# EAGLE board arduino shield_03 (EAGLE 9.5.2)
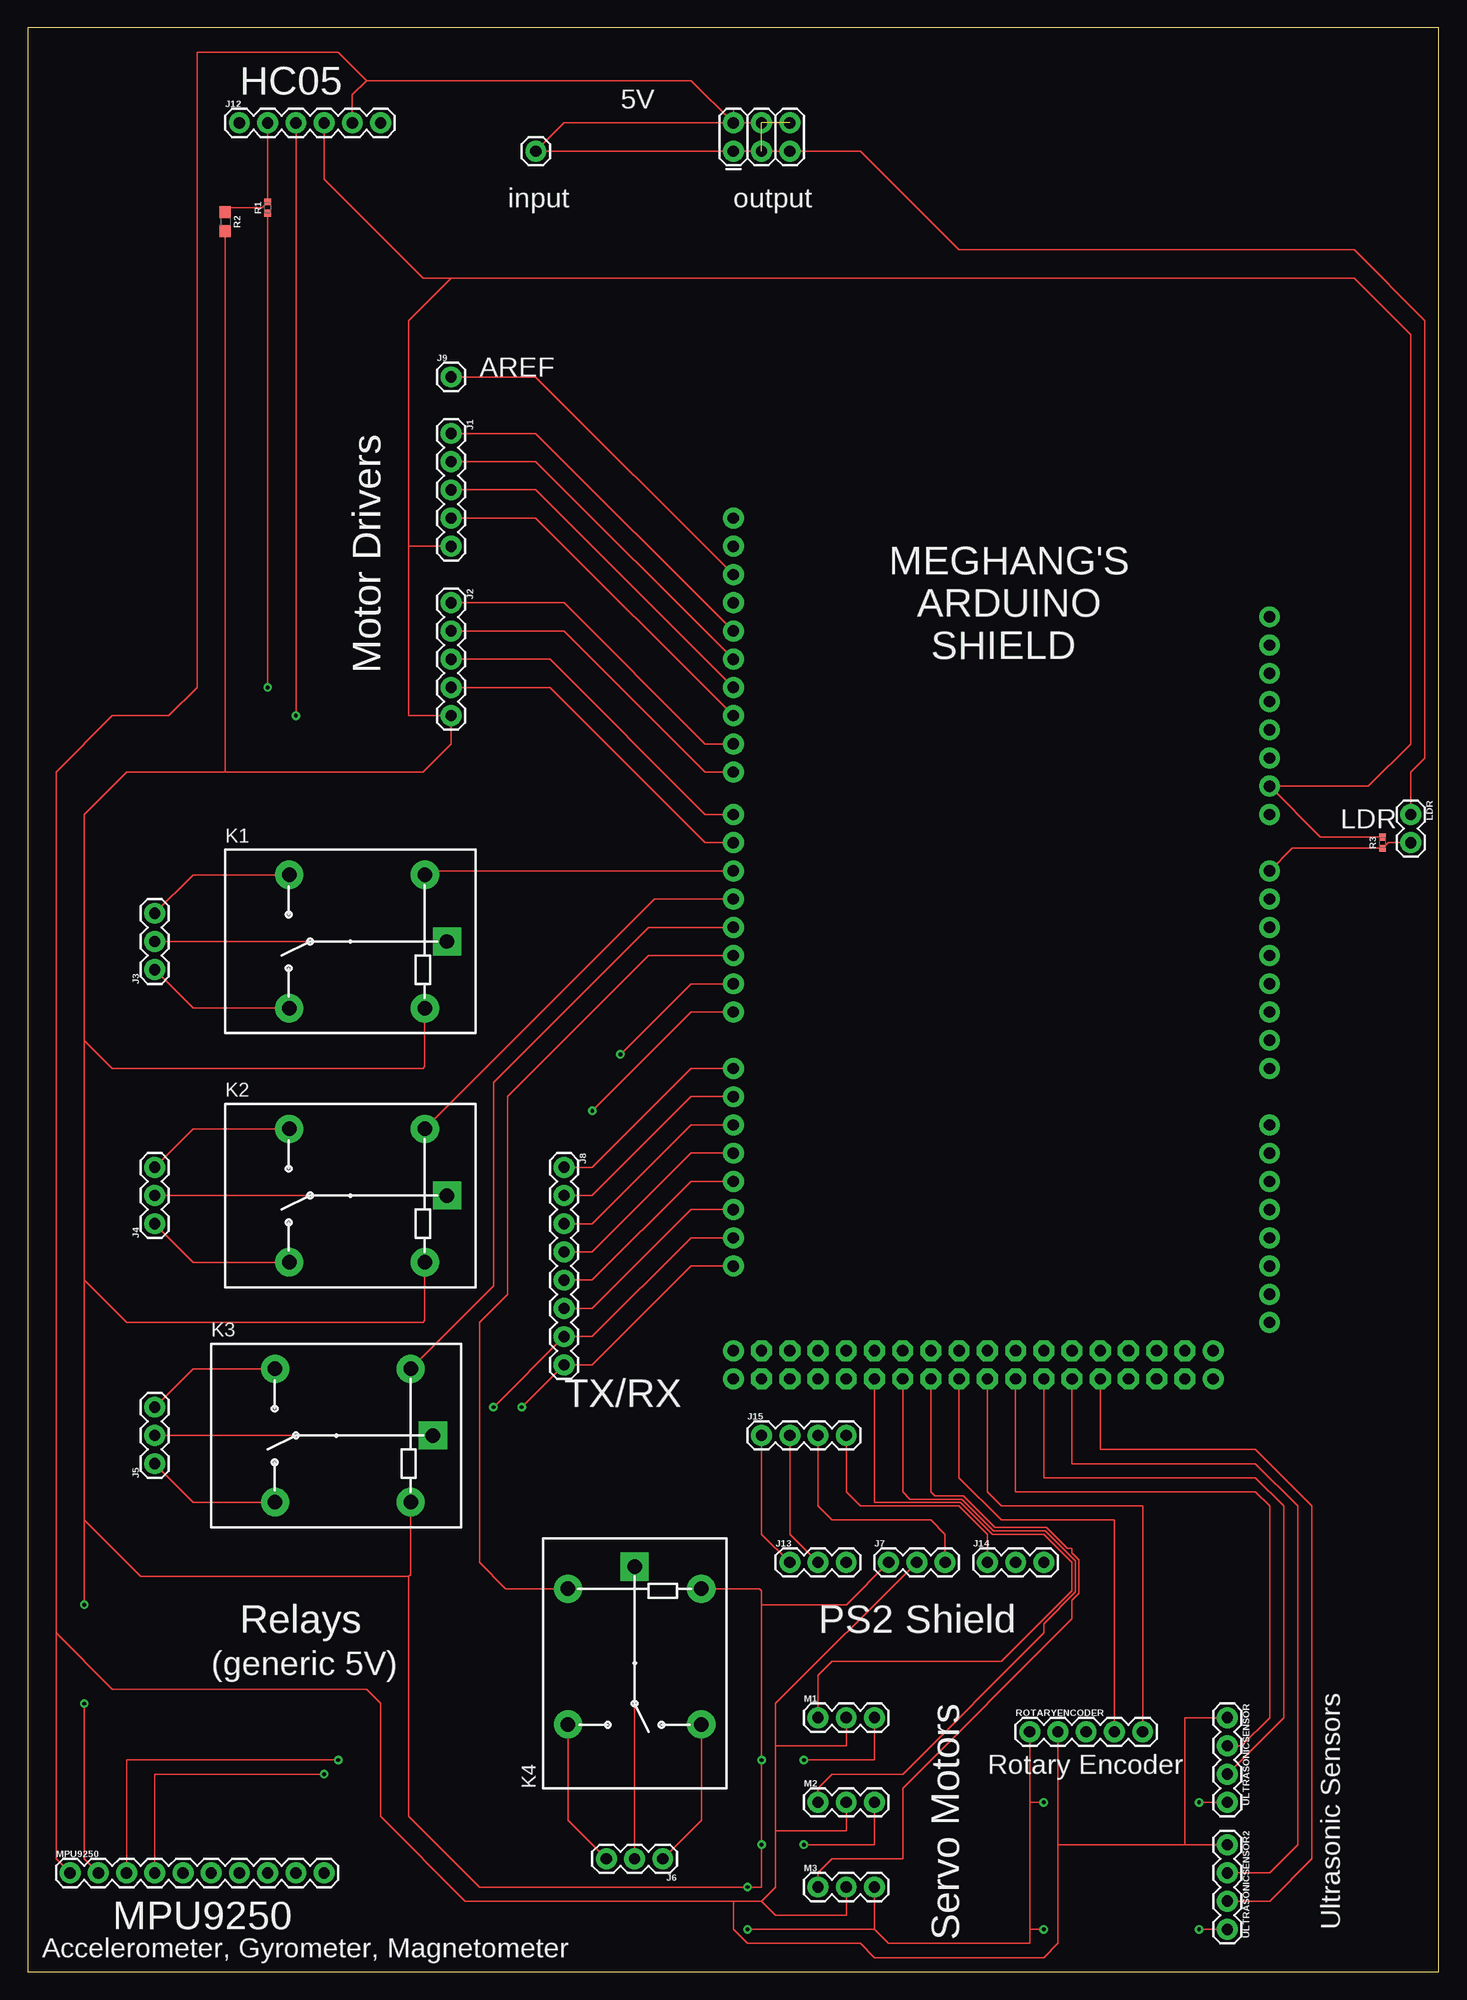
[diagram p0: board, top side]
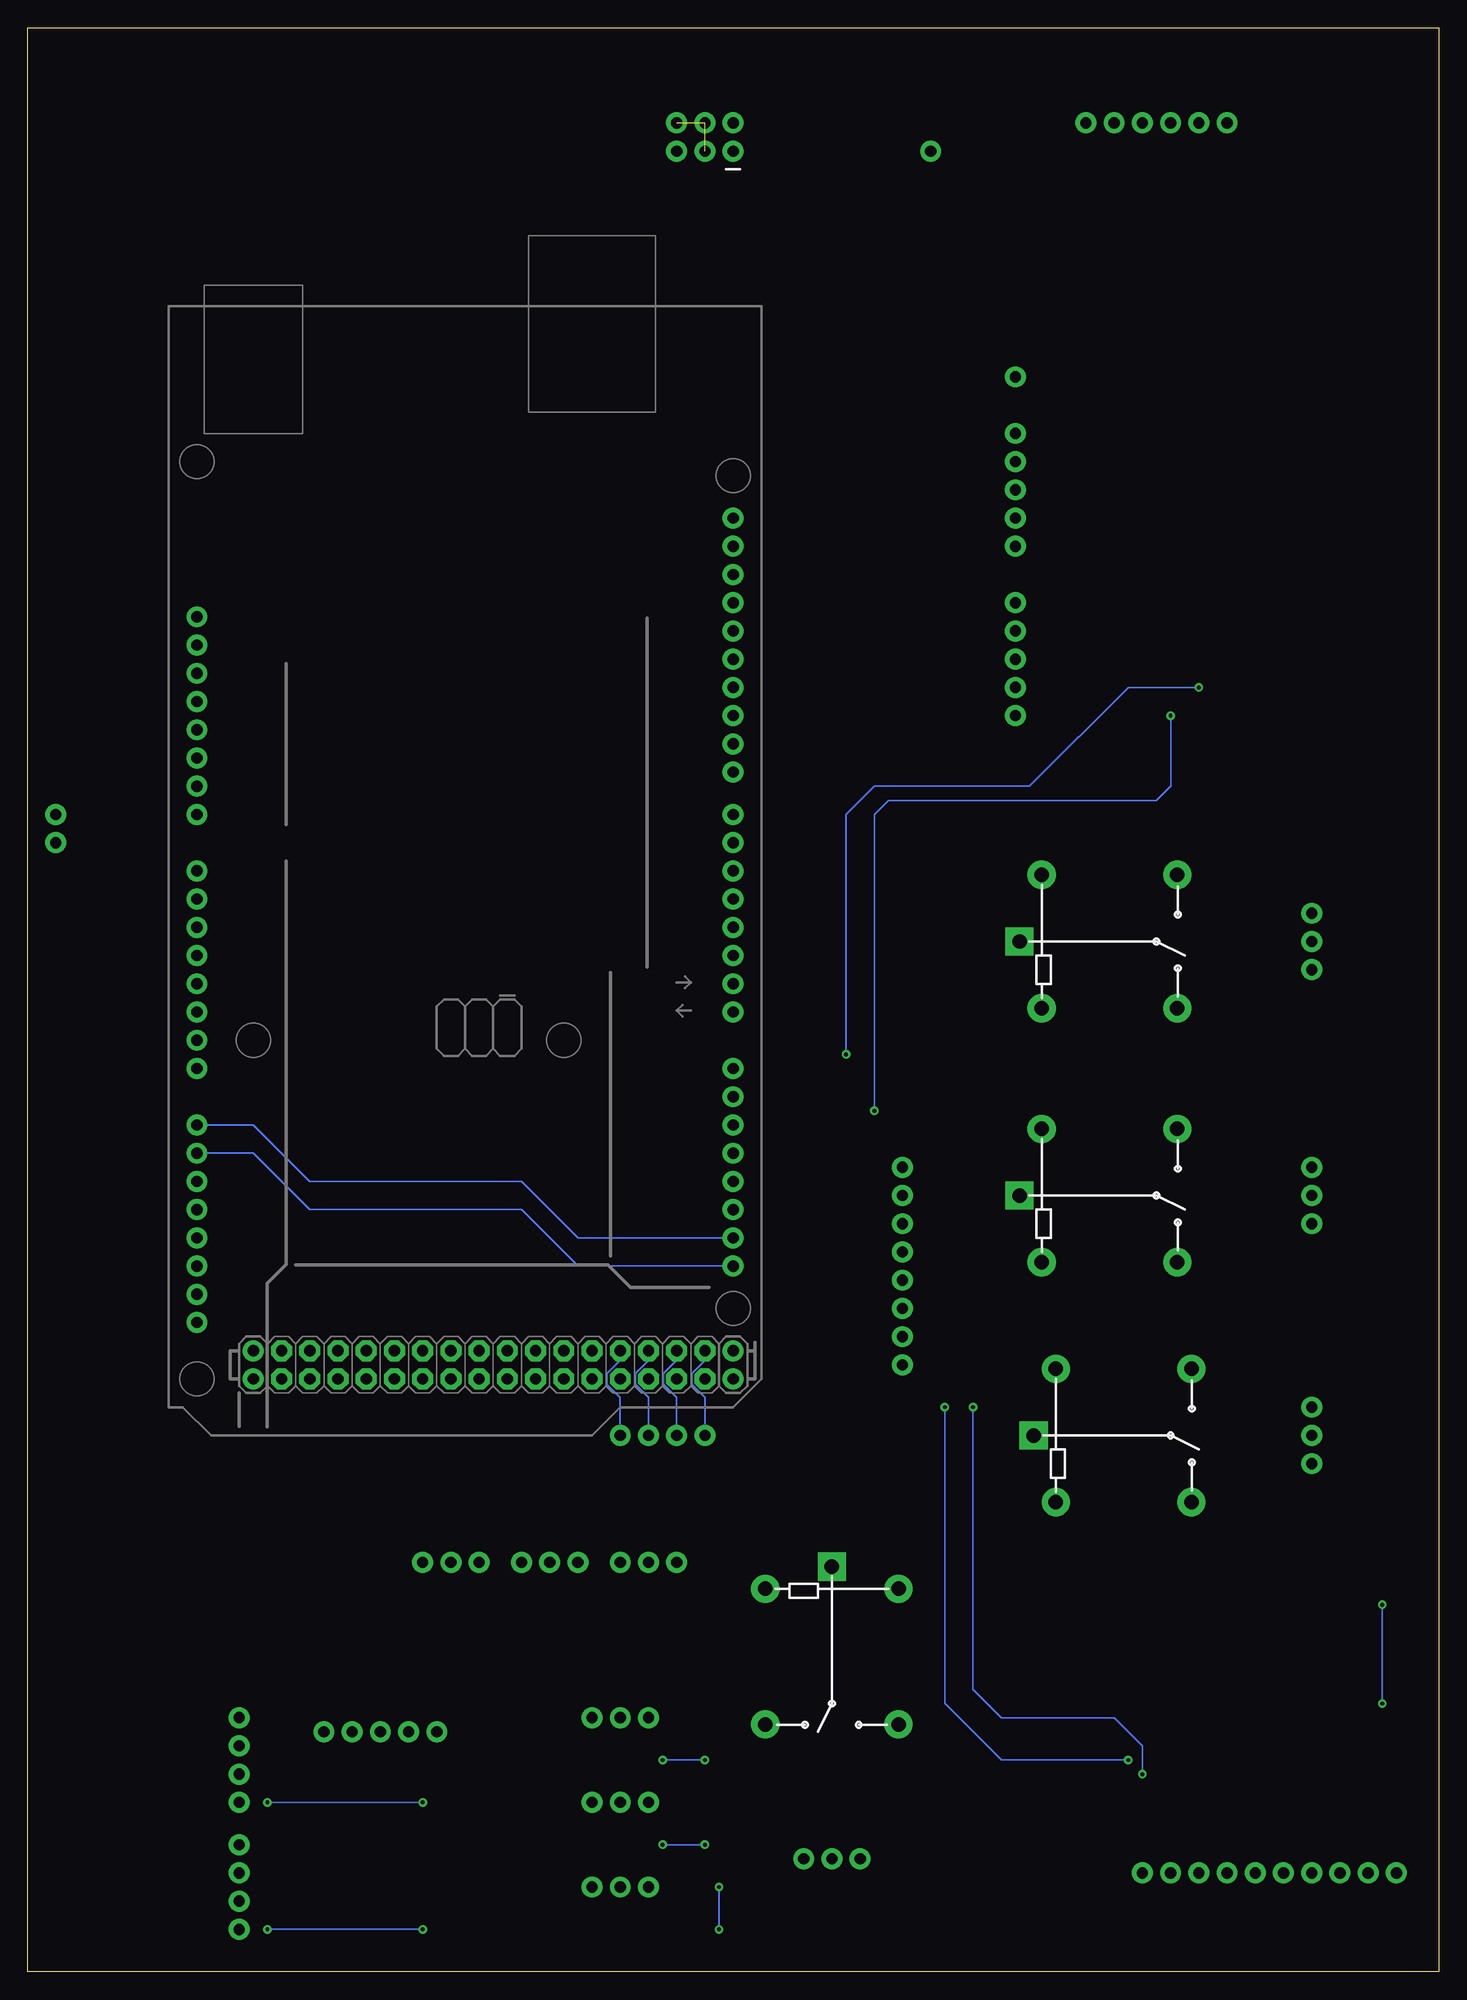
[diagram p1: board, bottom side, seen from below]

Size 126.98 x 174.93 mm. Coordinates in mm from the lower left corner, seen from the top.
Outline: 0,0 126.98,0 126.98,174.93 0,174.93 0,0
Copper layers (1*16): Top 0.035mm / dielectric 1.5mm / Bottom 0.035mm
Design rules "default": minimum track width 6mil, minimum drill 0.35mm, track to track 6mil, track to pad 6mil, pad to pad 6mil, via to via 6mil, smd to smd 6mil, copper to edge 40mil, drill to drill 6mil, minimum pad ring 10mil, minimum via ring 8mil, stop-mask expansion 4mil, vias tented up to drill 0mil, thermal gap 10mil

## Footprints (pad centres in the part's own frame; a part is rotated, then mirrored left to right if it is on the bottom)
ARDUINO_MEGA_NO_SILK = drill 1.016 pad 1.88: 0 13.97,24.13; 1 11.43,24.13; 2 8.89,24.13; 3 6.35,24.13; 3.3V -13.97,-24.13; 4 3.81,24.13; 5 1.27,24.13; 5V -11.43,-24.13; 5V@1 44.45,24.13; 5V@2 46.99,24.13; 6 -1.27,24.13; 7 -3.81,24.13; 8 -7.62,24.13; 9 -10.16,24.13; 10 -12.7,24.13; 11 -15.24,24.13; 12 -17.78,24.13; 13 -20.32,24.13; 14 19.05,24.13; 15 21.59,24.13; 16 24.13,24.13; 17 26.67,24.13; 18 29.21,24.13; 19 31.75,24.13; 20 34.29,24.13; 21 36.83,24.13; A0 1.27,-24.13; A1 3.81,-24.13; A2 6.35,-24.13; A3 8.89,-24.13; A4 11.43,-24.13; A5 13.97,-24.13; A6 16.51,-24.13; A7 19.05,-24.13; A8 24.13,-24.13; A9 26.67,-24.13; A10 29.21,-24.13; A11 31.75,-24.13; A12 34.29,-24.13; A13 36.83,-24.13; A14 39.37,-24.13; A15 41.91,-24.13; AREF -25.4,24.13; GND -8.89,-24.13; GND@1 -6.35,-24.13; GND@2 44.45,-19.05; GND@3 46.99,-19.05; GND@4 -22.86,24.13; IOREF -19.05,-24.13; NC -21.59,-24.13; RESET -16.51,-24.13; SCL -30.48,24.13; SDA -27.94,24.13; VIN -3.81,-24.13 | drill 1.016 pad 1.88 octagon: 22 44.45,21.59; 23 46.99,21.59; 24 44.45,19.05; 25 46.99,19.05; 26 44.45,16.51; 27 46.99,16.51; 28 44.45,13.97; 29 46.99,13.97; 30 44.45,11.43; 31 46.99,11.43; 32 44.45,8.89; 33 46.99,8.89; 34 44.45,6.35; 35 46.99,6.35; 36 44.45,3.81; 37 46.99,3.81; 38 44.45,1.27; 39 46.99,1.27; 40 44.45,-1.27; 41 46.99,-1.27; 42 44.45,-3.81; 43 46.99,-3.81; 44 44.45,-6.35; 45 46.99,-6.35; 46 44.45,-8.89; 47 46.99,-8.89; 48 44.45,-11.43; 49 46.99,-11.43; 50 44.45,-13.97; 51 46.99,-13.97; 52 44.45,-16.51; 53 46.99,-16.51
1X05 = drill 1.016 pad 1.88: 1 0,0; 2 2.54,0; 3 5.08,0; 4 7.62,0; 5 10.16,0
1X03 = drill 1.016 pad 1.88: 1 0,0; 2 2.54,0; 3 5.08,0
1X08 = drill 1.016 pad 1.88: 1 0,0; 2 2.54,0; 3 5.08,0; 4 7.62,0; 5 10.16,0; 6 12.7,0; 7 15.24,0; 8 17.78,0
1X01 = drill 1.016 pad 1.88: 1 0,0
2X3 = drill 1.016 pad 1.88: 1 0,0; 2 0,2.54; 3 2.54,0; 4 2.54,2.54; 5 5.08,0; 6 5.08,2.54
1X06 = drill 1.016 pad 1.88: 1 0,0; 2 2.54,0; 3 5.08,0; 4 7.62,0; 5 10.16,0; 6 12.7,0
1X04 = drill 1.016 pad 1.88: 1 0,0; 2 2.54,0; 3 5.08,0; 4 7.62,0
RELAY_G5LE = drill 1.3 pad 2.54 square: 1 8.52,-0.005 | drill 1.3 pad 2.54: 2 6.52,5.995; 3 -5.68,5.995; 4 -5.68,-6.005; 5 6.52,-6.005
1X02 = drill 1.016 pad 1.88: 1 0,0; 2 2.54,0
1X10 = drill 1.016 pad 1.88: 1 0,0; 2 2.54,0; 3 5.08,0; 4 7.62,0; 5 10.16,0; 6 12.7,0; 7 15.24,0; 8 17.78,0; 9 20.32,0; 10 22.86,0
0402-TIGHT = smd 0.6 x 0.6: 1 -0.5,0; 2 0.5,0
0603 = smd 1.1 x 1: 1 -0.85,0; 2 0.85,0

## Placement (x,y rotation side)
B1  ARDUINO_MEGA_R3FULL  [ARDUINO_MEGA_NO_SILK]  87.63,100.33 270 bottom
J1  [1X05]  38.1,138.43 270 top
J2  [1X05]  38.1,123.19 270 top
J3  455-1750-1-ND  [1X03]  11.43,90.17 90 top
J4  455-1750-1-ND  [1X03]  11.43,67.31 90 top
J5  455-1750-1-ND  [1X03]  11.43,45.72 90 top
J6  455-1750-1-ND  [1X03]  57.15,10.16 180 top
J7  455-1750-1-ND  [1X03]  77.47,36.83 0 top
J8  [1X08]  48.26,72.39 270 top
J9  [1X01]  38.1,143.51 0 top
J10  FEMALE 2x3  [2X3]  63.5,163.83 0 top
J11  [1X01]  45.72,163.83 0 top
J12  [1X06]  19.05,166.37 0 top
J13  455-1750-1-ND  [1X03]  68.58,36.83 0 top
J14  455-1750-1-ND  [1X03]  86.36,36.83 0 top
J15  [1X04]  66.04,48.26 0 top
K1  RELAY-SPDT  [RELAY_G5LE]  29.21,92.71 0 top
K2  RELAY-SPDT  [RELAY_G5LE]  29.21,69.85 0 top
K3  RELAY-SPDT  [RELAY_G5LE]  27.94,48.26 0 top
K4  RELAY-SPDT  [RELAY_G5LE]  54.61,27.94 90 top
LDR  [1X02]  124.46,104.14 270 top
M1  SERVO  [1X03]  71.12,22.86 0 top
M2  SERVO  [1X03]  71.12,15.24 0 top
M3  SERVO  [1X03]  71.12,7.62 0 top
MPU9250  [1X10]  3.81,8.89 0 top
R1  1k  [0402-TIGHT]  21.59,158.75 90 top
R2  2.0k  [0603]  17.78,157.48 270 top
R3  1k  [0402-TIGHT]  121.92,101.6 90 top
ROTARYENCODER  [1X05]  90.17,21.59 0 top
ULTRASONICSENSOR  [1X04]  107.95,22.86 270 top
ULTRASONICSENSOR2  [1X04]  107.95,11.43 270 top

## Library data of the parts
B1 = SparkFun-Boards
J1 J2 J9 J11 LDR ROTARYENCODER = SparkFun-Connectors
J3-J7 J13 J14 = SparkFun-Connectors; PROD_ID: XXX-00000
J8 = SparkFun-Connectors; PROD_ID: CONN-08438
J10 = SparkFun-Connectors; PROD_ID: CONN-11566
J12 = SparkFun-Connectors; PROD_ID: CONN-08437
J15 ULTRASONICSENSOR ULTRASONICSENSOR2 = SparkFun-Connectors; PROD_ID: CONN-09696
K1-K4 = SparkFun-Electromechanical; PROD_ID: COMP-14214
M1-M3 = SparkFun-Electromechanical
MPU9250 = SparkFun-Connectors; PROD_ID: CONN-11563
R1 R3 = SparkFun-Resistors; PROD_ID: RES-14342
R2 = SparkFun-Resistors; PROD_ID: RES-08296

## Nets
ATT: B1.26 J7.3 J15.3
CLC: B1.28 J14.1 J15.4
COMM: B1.24 J13.2 J15.2
DATA: B1.22 J13.1 J15.1
GND001: B1.GND@1 J1.5 J2.5 J7.1 J12.4 K1.5 K2.5 K3.5 K4.5 M1.3 M2.3 M3.3 MPU9250.2 R2.2 R3.2 ROTARYENCODER.1 ULTRASONICSENSOR2.4 ULTRASONICSENSOR.4
N$1: B1.13 J1.1
N$2: B1.12 J1.2
N$3: B1.11 J1.3
N$4: B1.10 J1.4
N$5: B1.9 J2.1
N$6: B1.8 J2.2
N$7: B1.7 J2.3
N$8: B1.6 J2.4
N$9: J12.2 R1.2 R2.1
N$10: B1.5 K1.2
N$11: B1.4 K2.2
N$12: J3.1 K1.4
N$13: B1.3 K3.2
N$14: B1.2 K4.2
N$15: J3.3 K1.3
N$16: J3.2 K1.1
N$17: J4.1 K2.4
N$18: J4.3 K2.3
N$19: J4.2 K2.1
N$20: J5.1 K3.4
N$21: J5.3 K3.3
N$22: J5.2 K3.1
N$23: J6.1 K4.4
N$24: J6.3 K4.3
N$25: J6.2 K4.1
N$26: B1.39 ROTARYENCODER.5
N$27: B1.37 ROTARYENCODER.4
N$28: B1.41 ULTRASONICSENSOR.2
N$29: J13.3
N$30: B1.43 ULTRASONICSENSOR.3
N$31: B1.AREF J9.1
N$32: B1.14 J8.1
N$33: B1.15 J8.2
N$34: B1.16 J8.3
N$35: B1.17 J8.4
N$36: B1.18 J8.5
N$37: B1.19 J8.6
N$40: B1.A0 LDR.2 R3.1
N$41: B1.45 ULTRASONICSENSOR2.2
N$42: B1.47 ULTRASONICSENSOR2.3
N$44: J14.3
N$45: J14.2
POW001: J7.2 J10.1 J10.2 J10.3 J10.4 J10.5 J10.6 J11.1 J12.5 LDR.1 M1.2 M2.2 M3.2 MPU9250.1 ROTARYENCODER.2 ULTRASONICSENSOR2.1 ULTRASONICSENSOR.1
RX: B1.1 R1.1
SCL: B1.21 B1.A9 J8.8 MPU9250.3
SDA: B1.20 B1.A8 J8.7 MPU9250.4
SIG001: B1.31 M1.1
SIG002: B1.33 M2.1
SIG003: B1.35 M3.1
TX: B1.0 J12.3

## Tracks (layer width: path | path; a pad name or v marks a point on that pad's centre or on a via)
ATT
  Top 0.152: J7.3 82.55,39.37 81.28,40.64 72.39,40.64 71.12,41.91 J15.3
  Bottom 0.152: B1.26 71.12,54.99 72.29,53.82 72.29,52.86 71.12,51.69 J15.3
CLC
  Top 0.152: J14.1 86.36,39.37 83.82,41.91 74.93,41.91 73.66,43.18 J15.4
  Bottom 0.152: B1.28 73.66,54.99 74.83,53.82 74.83,52.86 73.66,51.69 J15.4
COMM
  Top 0.152: J15.2 68.58,39.37 J13.2
  Bottom 0.152: B1.24 68.58,54.99 69.75,53.82 69.75,52.86 68.58,51.69 J15.2
DATA
  Top 0.152: J15.1 66.04,39.37 J13.1
  Bottom 0.152: B1.22 66.04,54.99 67.21,53.82 67.21,52.86 66.04,51.69 J15.1
GND001  (via drill 0.35)
  Top 0.152: J1.5 34.29,128.27 | 34.29,128.27 34.29,113.03 J2.5 38.1,110.49 35.56,107.95 17.78,107.95 | 34.29,128.27 34.29,148.59 38.1,152.4 | 38.1,152.4 119.38,152.4 124.46,147.32 124.46,110.49 120.65,106.68 B1.GND@1 116.34,102.1 R3.2 | K1.5 35.73,81.45 35.56,81.28 7.62,81.28 5.08,83.82 | 5.08,83.82 5.08,104.14 8.89,107.95 17.78,107.95 | K2.5 35.73,58.59 35.56,58.42 8.89,58.42 5.08,62.23 | 5.08,62.23 5.08,83.82 | K3.5 34.46,35.73 34.29,35.56 | 34.29,35.56 10.16,35.56 5.08,40.64 | 5.08,40.64 5.08,62.23 | K4.5 65.87,34.46 66.04,34.29 66.04,33.02 | 66.04,33.02 v66.04,19.05 v66.04,11.43 66.04,7.62 v64.77,7.62 40.64,7.62 34.29,13.97 34.29,35.56 | 38.1,152.4 35.56,152.4 26.67,161.29 J12.4 | R2.2 17.78,107.95 | J7.1 73.66,33.02 66.04,33.02 | M1.3 76.2,19.05 v69.85,19.05 | M2.3 76.2,11.43 v69.85,11.43 | M3.3 76.2,3.81 | 76.2,3.81 v64.77,3.81 | ROTARYENCODER.1 90.17,15.24 | 90.17,15.24 90.17,3.81 | 90.17,3.81 90.17,2.54 77.47,2.54 76.2,3.81 | ULTRASONICSENSOR.4 v105.41,15.24 | v91.44,15.24 90.17,15.24 | ULTRASONICSENSOR2.4 v105.41,3.81 | v91.44,3.81 90.17,3.81 | MPU9250.2 5.08,10.16 v5.08,24.13 | v5.08,33.02 5.08,40.64
  Bottom 0.152: v69.85,19.05 v66.04,19.05 | v69.85,11.43 v66.04,11.43 | v64.77,3.81 v64.77,7.62 | v105.41,15.24 v91.44,15.24 | v105.41,3.81 v91.44,3.81 | v5.08,24.13 v5.08,33.02
N$1
  Top 0.152: B1.13 45.72,138.43 J1.1
N$2
  Top 0.152: B1.12 45.72,135.89 J1.2
N$3
  Top 0.152: J1.3 45.72,133.35 B1.11
N$4
  Top 0.152: B1.10 45.72,130.81 J1.4
N$5
  Top 0.152: B1.9 60.96,110.49 48.26,123.19 J2.1
N$6
  Top 0.152: B1.8 60.96,107.95 48.26,120.65 J2.2
N$7
  Top 0.152: B1.7 60.96,104.14 46.99,118.11 J2.3
N$8
  Top 0.152: B1.6 60.96,101.6 46.99,115.57 J2.4
N$9
  Top 0.152: J12.2 R1.2 21.09,158.75 17.78,158.75 R2.1
N$10
  Top 0.152: K1.2 36.09,99.06 B1.5
N$11
  Top 0.152: K2.2 56.41,96.52 B1.4
N$12
  Top 0.152: K1.4 14.9,86.7 J3.1
N$13
  Top 0.152: K3.2 41.91,61.7 41.91,80.01 55.88,93.98 B1.3
N$14
  Top 0.152: K4.2 43.01,34.46 40.64,36.83 40.64,58.42 43.18,60.96 43.18,78.74 55.88,91.44 B1.2
N$15
  Top 0.152: K1.3 14.88,98.7 J3.3
N$16
  Top 0.152: K1.1 J3.2
N$17
  Top 0.152: K2.4 14.9,63.84 J4.1
N$18
  Top 0.152: K2.3 14.88,75.84 J4.3
N$19
  Top 0.152: K2.1 J4.2
N$20
  Top 0.152: K3.4 14.9,42.26 J5.1
N$21
  Top 0.152: K3.3 14.88,54.26 J5.3
N$22
  Top 0.152: K3.1 J5.2
N$23
  Top 0.152: K4.4 60.61,13.62 J6.1
N$24
  Top 0.152: K4.3 48.61,13.62 J6.3
N$25
  Top 0.152: K4.1 J6.2
N$26
  Top 0.152: B1.39 86.36,43.18 87.63,41.91 100.33,41.91 ROTARYENCODER.5
N$27
  Top 0.152: B1.37 83.82,44.45 87.63,40.64 97.79,40.64 ROTARYENCODER.4
N$28
  Top 0.152: B1.41 88.9,43.18 110.49,43.18 111.76,41.91 111.76,22.86 109.22,20.32 ULTRASONICSENSOR.2
N$30
  Top 0.152: B1.43 91.44,44.45 110.49,44.45 113.03,41.91 113.03,22.86 ULTRASONICSENSOR.3
N$31
  Top 0.152: B1.AREF 45.72,143.51 J9.1
N$32
  Top 0.152: B1.14 59.69,81.28 50.8,72.39 J8.1
N$33
  Top 0.152: B1.15 59.69,78.74 50.8,69.85 J8.2
N$34
  Top 0.152: B1.16 59.69,76.2 50.8,67.31 J8.3
N$35
  Top 0.152: B1.17 59.69,73.66 50.8,64.77 J8.4
N$36
  Top 0.152: B1.18 59.69,71.12 50.8,62.23 J8.5
N$37
  Top 0.152: B1.19 59.69,68.58 50.8,59.69 J8.6
N$40
  Top 0.152: LDR.2 122.42,101.6 R3.1 113.8,101.1 B1.A0
N$41
  Top 0.152: B1.45 93.98,45.72 110.49,45.72 114.3,41.91 114.3,11.43 111.76,8.89 ULTRASONICSENSOR2.2
N$42
  Top 0.152: B1.47 96.52,46.99 110.49,46.99 115.57,41.91 115.57,10.16 111.76,6.35 ULTRASONICSENSOR2.3
POW001  (2 unrouted)
  Top 0.152: J10.2 J10.6 | J10.2 48.26,166.37 J11.1 J10.1 J10.5 74.93,163.83 83.82,154.94 119.38,154.94 125.73,148.59 125.73,109.22 124.46,107.95 LDR.1 | 63.5,167.49 J10.2 | J12.5 29.21,168.91 30.48,170.18 | 30.48,170.18 59.69,170.18 J10.2 | J7.2 67.31,24.13 67.31,20.32 | 67.31,20.32 67.31,12.7 | 67.31,12.7 67.31,7.62 66.04,6.35 | 2.54,30.48 7.62,25.4 30.48,25.4 31.75,24.13 31.75,13.97 39.37,6.35 63.5,6.35 | 2.54,30.48 2.54,107.95 7.62,113.03 12.7,113.03 15.24,115.57 15.24,172.72 27.94,172.72 30.48,170.18 | 66.04,6.35 63.5,6.35 | M1.2 73.66,20.32 67.31,20.32 | M2.2 73.66,12.7 67.31,12.7 | M3.2 73.66,5.08 67.31,5.08 66.04,6.35 | ROTARYENCODER.2 92.71,11.43 | 92.71,11.43 92.71,2.54 91.44,1.27 76.2,1.27 74.93,2.54 64.77,2.54 63.5,3.81 63.5,6.35 | ULTRASONICSENSOR.1 104.14,22.86 104.14,11.43 | 104.14,11.43 ULTRASONICSENSOR2.1 | 104.14,11.43 92.71,11.43 | MPU9250.1 2.54,10.16 2.54,30.48
RX  (via drill 0.35)
  Top 0.152: v53.34,82.55 59.69,88.9 B1.1 | v21.59,115.57 R1.1
  Bottom 0.152: v53.34,82.55 53.34,104.14 50.8,106.68 36.83,106.68 27.94,115.57 v21.59,115.57
SCL  (via drill 0.35)
  Top 0.152: B1.21 59.69,63.5 50.8,54.61 J8.8 v44.45,50.8 | MPU9250.3 8.89,19.05 v27.94,19.05
  Bottom 0.152: v27.94,19.05 39.37,19.05 44.45,24.13 v44.45,50.8 | B1.21 77.47,63.5 82.55,68.58 101.6,68.58 106.68,73.66 B1.A9
SDA  (via drill 0.35)
  Top 0.152: B1.20 59.69,66.04 50.8,57.15 J8.7 v41.91,50.8 | MPU9250.4 11.43,17.78 v26.67,17.78
  Bottom 0.152: v26.67,17.78 26.67,20.32 29.21,22.86 39.37,22.86 41.91,25.4 v41.91,50.8 | B1.20 77.47,66.04 82.55,71.12 101.6,71.12 106.68,76.2 B1.A8
SIG001
  Top 0.152: B1.31 76.2,42.22 83.95,42.22 86.79,39.37 91.44,39.37 93.98,36.83 93.98,34.29 87.63,27.94 72.39,27.94 71.12,26.67 M1.1
SIG002
  Top 0.152: B1.33 78.74,43.18 79.4,42.52 84.07,42.52 86.92,39.67 91.57,39.67 94.28,36.96 94.28,34.16 91.44,31.32 91.44,30.48 78.74,17.78 72.39,17.78 71.12,16.51 M2.1
SIG003
  Top 0.152: B1.35 81.28,43.18 81.64,42.82 84.2,42.82 87.04,39.98 91.69,39.98 93.57,38.1 93.98,38.1 93.98,37.69 94.59,37.08 94.59,34.04 93.98,33.43 93.98,31.75 78.74,16.51 78.74,10.16 72.39,10.16 71.12,8.89 M3.1
TX  (via drill 0.35)
  Top 0.152: v50.8,77.47 59.69,86.36 B1.0 | v24.13,113.03 J12.3
  Bottom 0.152: v24.13,113.03 24.13,106.68 25.4,105.41 49.53,105.41 50.8,104.14 v50.8,77.47

## Text on the board
tNames: HC05 | 5V | input | output | AREF | MEGHANG'S | ARDUINO | SHIELD | Motor Drivers | LDR | TX/RX | Relays | PS2 Shield | (generic 5V) | Servo Motors | Rotary Encoder | MPU9250 | Ultrasonic Sensors | Accelerometer, Gyrometer, Magnetometer